# EAGLE board CT_schematic (EAGLE 7.6.0)

Size 100 x 80 mm. Coordinates in mm from the lower left corner, seen from the top.
Outline: 0,0 100,0 100,80 0,80 0,0
Copper layers (1*16): Top 0.035mm / dielectric 1.5mm / Bottom 0.035mm
Design rules "default": minimum track width 10mil, minimum drill 24mil, track to track 8mil, track to pad 8mil, pad to pad 8mil, via to via 8mil, smd to smd 8mil, copper to edge 40mil, drill to drill 8mil, minimum pad ring 10mil, minimum via ring 8mil, stop-mask expansion 4mil, vias tented up to drill 0mil, thermal gap 10mil

## Footprints (pad centres in the part's own frame; a part is rotated, then mirrored left to right if it is on the bottom)
C0603 = smd 0.8 x 0.8: 1 -0.762,0; 2 0.762,0
C0402 = smd 0.5 x 0.5: 1 -0.508,0; 2 0.508,0
C0805 = smd 1.2 x 1.3: 1 -1.016,0; 2 1.016,0
C1210 = smd 1.2 x 2.5: 1 -1.524,0; 2 1.524,0
EXV-9H = smd 3.505 x 1.676: 1 -2.857,0; 2 2.857,0
L0603 = smd 0.8 x 0.8: 1 -0.762,0; 2 0.762,0
PJ-037B_PACKAGE = drill 3.7 square: 1 12,0 | drill 3.2 square: 2 6,0
R0603 = smd 0.8 x 0.8: 1 -0.762,0; 2 0.762,0
LQFP100 = smd 0.3 x 1.2: 1 -6,-7.75; 2 -5.5,-7.75; 3 -5,-7.75; 4 -4.5,-7.75; 5 -4,-7.75; 6 -3.5,-7.75; 7 -3,-7.75; 8 -2.5,-7.75; 9 -2,-7.75; 10 -1.5,-7.75; 11 -1,-7.75; 12 -0.5,-7.75; 13 0,-7.75; 14 0.5,-7.75; 15 1,-7.75; 16 1.5,-7.75; 17 2,-7.75; 18 2.5,-7.75; 19 3,-7.75; 20 3.5,-7.75; 21 4,-7.75; 22 4.5,-7.75; 23 5,-7.75; 24 5.5,-7.75; 25 6,-7.75; 51 6,7.75; 52 5.5,7.75; 53 5,7.75; 54 4.5,7.75; 55 4,7.75; 56 3.5,7.75; 57 3,7.75; 58 2.5,7.75; 59 2,7.75; 60 1.5,7.75; 61 1,7.75; 62 0.5,7.75; 63 0,7.75; 64 -0.5,7.75; 65 -1,7.75; 66 -1.5,7.75; 67 -2,7.75; 68 -2.5,7.75; 69 -3,7.75; 70 -3.5,7.75; 71 -4,7.75; 72 -4.5,7.75; 73 -5,7.75; 74 -5.5,7.75; 75 -6,7.75 | smd 1.2 x 0.3: 26 7.75,-6; 27 7.75,-5.5; 28 7.75,-5; 29 7.75,-4.5; 30 7.75,-4; 31 7.75,-3.5; 32 7.75,-3; 33 7.75,-2.5; 34 7.75,-2; 35 7.75,-1.5; 36 7.75,-1; 37 7.75,-0.5; 38 7.75,0; 39 7.75,0.5; 40 7.75,1; 41 7.75,1.5; 42 7.75,2; 43 7.75,2.5; 44 7.75,3; 45 7.75,3.5; 46 7.75,4; 47 7.75,4.5; 48 7.75,5; 49 7.75,5.5; 50 7.75,6; 76 -7.75,6; 77 -7.75,5.5; 78 -7.75,5; 79 -7.75,4.5; 80 -7.75,4; 81 -7.75,3.5; 82 -7.75,3; 83 -7.75,2.5; 84 -7.75,2; 85 -7.75,1.5; 86 -7.75,1; 87 -7.75,0.5; 88 -7.75,0; 89 -7.75,-0.5; 90 -7.75,-1; 91 -7.75,-1.5; 92 -7.75,-2; 93 -7.75,-2.5; 94 -7.75,-3; 95 -7.75,-3.5; 96 -7.75,-4; 97 -7.75,-4.5; 98 -7.75,-5; 99 -7.75,-5.5; 100 -7.75,-6
SOT-23-6 = smd 1.1 x 0.6: 1 -1.4,0.95; 2 -1.4,0; 3 -1.4,-0.95; 4 1.4,-0.95; 5 1.4,0; 6 1.4,0.95
LGA14R35P5X6_200X200X100 = smd 0.35 x 0.15: 1 -0.8,0.525; 2 -0.8,0.175; 3 -0.8,-0.175; 4 -0.8,-0.525; 8 0.8,-0.525; 9 0.8,-0.175; 10 0.8,0.175; 11 0.8,0.525 | smd 0.15 x 0.35: 5 -0.35,-0.8; 6 0,-0.8; 7 0.35,-0.8; 12 0.35,0.8; 13 0,0.8; 14 -0.35,0.8
ESP8266-12E = smd 2 x 1.2: 1 -7.5,7; 2 -7.5,5; 3 -7.5,3; 4 -7.5,1; 5 -7.5,-1; 6 -7.5,-3; 7 -7.5,-5; 8 -7.5,-7; 15 7.5,-7; 16 7.5,-5; 17 7.5,-3; 18 7.5,-1; 19 7.5,1; 20 7.5,3; 21 7.5,5; 22 7.5,7 | smd 1.1 x 1.7: 9 -5,-8.5; 10 -3,-8.5; 11 -1,-8.5; 12 1,-8.5; 13 3,-8.5; 14 5,-8.5
SAMTEC_FTSH-105-01-L-DV-K = smd 0.762 x 2.794: 1 -2.54,-2.032; 2 -2.54,2.032; 3 -1.27,-2.032; 4 -1.27,2.032; 5 0,-2.032; 6 0,2.032; 7 1.27,-2.032; 8 1.27,2.032; 9 2.54,-2.032; 10 2.54,2.032
MOLEX_47219-2001 = smd 0.8 x 1.5: 1 3.2,-2.1; 2 2.1,-2.1; 3 1,-2.1; 4 -0.1,-2.1; 5 -1.2,-2.1; 6 -2.3,-2.1; 7 -3.4,-2.1; 8 -4.5,-2.1 | smd 1.5 x 2.05: G1 6.875,-4.7; G2 6.875,3.6; G3 -6.875,3.6; G4 -6.875,-4.7
MICRO_USB_AB = smd 0.4 x 1.35: 1 1.3,0.26; 2 0.65,0.26; 3 0,0.26; 4 -0.65,0.26; 5 -1.3,0.26 | drill 0.6 pad 0.95 long: 6 4.175,-2.54; 7 -4.175,-2.54 | drill 0.7 pad 1.1 long: 8 -2.225,0.46; 9 2.225,0.46
SOT143B = smd 1 x 0.7: 1 -0.75,-1 | smd 0.6 x 0.7: 2 0.95,-1; 3 0.95,1; 4 -0.95,1
ABLS-25.000MHZ-B2F-T = smd 5.6 x 2.8: 1 -3.81,0; 2 5.69,0
ASEK = smd 1.4 x 1: 1 -1.1,-0.8; 2 1.1,-0.8; 3 1.1,0.8; 4 -1.1,0.8
WSON-8 = smd 0.3 x 0.6: 1 -0.75,0; 2 0.05,0; 3 0.85,0; 4 1.65,0; 5 1.65,3.8; 6 0.85,3.8; 7 0.05,3.8; 8 -0.75,3.8 | smd 3 x 2.6: PAD 0.45,1.9
SON-6 = smd 0.55 x 0.3: 1 -0.355,0.5 | smd 0.52 x 0.3: 2 -0.37,0; 3 -0.37,-0.5; 4 0.37,-0.5; 5 0.37,0; 6 0.37,0.5
SW_4-1437565-2 = smd 1.4 x 2.1: 1 -2.23,4.55; 2 -2.23,-4.55; 3 2.23,4.55; 4 2.23,-4.55
LGM67K-G1J2-24-Z = smd 0.8 x 1.4: A -2,0; C 0,0
NC7SZ125M5X = smd 1.3 x 0.7: 1 -1.3,0.95; 2 -1.3,0; 3 -1.3,-0.95; 4 1.3,-0.95; 5 1.3,0.95

## Placement (x,y rotation side)
C1  1e-06  [C0603]  -30.48,85.09 0 top  (outside the outline)
C2  1e-07  [C0603]  -34.29,85.09 0 top  (outside the outline)
C3  1e-07  [C0603]  -38.1,85.09 0 top  (outside the outline)
C4  1e-07  [C0603]  -41.91,85.09 0 top  (outside the outline)
C5  1e-07  [C0603]  -45.72,85.09 0 top  (outside the outline)
C6  1e-07  [C0603]  -49.53,85.09 0 top  (outside the outline)
C7  1e-07  [C0603]  -53.34,85.09 0 top  (outside the outline)
C8  4.7e-06  [C0603]  -19.05,85.09 0 top  (outside the outline)
C9  2.2e-06  [C0603]  -22.86,85.09 0 top  (outside the outline)
C10  2.2e-06  [C0603]  -26.67,85.09 0 top  (outside the outline)
C11  1e-08  [C0603]  -57.15,85.09 0 top  (outside the outline)
C12  1e-06  [C0603]  -60.96,85.09 0 top  (outside the outline)
C13  1e-11  [C0402]  -41.91,90.17 0 top  (outside the outline)
C14  1e-11  [C0402]  -45.72,90.17 0 top  (outside the outline)
C15  1e-07  [C0402]  -49.53,90.17 0 top  (outside the outline)
C16  1e-07  [C0402]  -53.34,90.17 0 top  (outside the outline)
C17  1e-07  [C0402]  -57.15,90.17 0 top  (outside the outline)
C18  1e-05  [C0805]  -21.59,74.93 0 top  (outside the outline)
C19  1e-07  [C0402]  -60.96,90.17 0 top  (outside the outline)
C20  1e-07  [C0402]  -64.77,90.17 0 top  (outside the outline)
C21  1e-05  [C0805]  -26.67,74.93 0 top  (outside the outline)
C22  1e-08  [C0402]  -68.58,90.17 0 top  (outside the outline)
C23  1e-08  [C0402]  -72.39,90.17 0 top  (outside the outline)
C24  1e-05  [C1210]  -38.1,68.58 0 top  (outside the outline)
C25  1e-05  [C1210]  -44.45,68.58 0 top  (outside the outline)
C26  1e-08  [C0402]  -76.2,90.17 0 top  (outside the outline)
C27  1e-05  [C1210]  -50.8,68.58 0 top  (outside the outline)
C28  1e-05  [C1210]  -57.15,68.58 0 top  (outside the outline)
C29  1e-07  [C0402]  -80.01,90.17 0 top  (outside the outline)
C30  0.0001  [EXV-9H]  -38.1,60.96 0 top  (outside the outline)
C31  0.0001  [EXV-9H]  -49.53,60.96 0 top  (outside the outline)
C32  1e-08  [C0402]  -15.24,95.25 0 top  (outside the outline)
C33  1e-08  [C0402]  -19.05,95.25 0 top  (outside the outline)
C34  1e-08  [C0402]  -22.86,95.25 0 top  (outside the outline)
F1  240.0  [L0603]  -64.77,85.09 0 top  (outside the outline)
J1  PJ-037B  [PJ-037B_PACKAGE]  -57.15,38.1 0 top  (outside the outline)
R2  1000.0  [R0603]  -68.58,85.09 0 top  (outside the outline)
R4  4700.0  [R0603]  -72.39,85.09 0 top  (outside the outline)
R5  4700.0  [R0603]  -76.2,85.09 0 top  (outside the outline)
R6  2200.0  [R0603]  -80.01,85.09 0 top  (outside the outline)
R7  2200.0  [R0603]  -15.24,90.17 0 top  (outside the outline)
R8  47000.0  [R0603]  -15.24,80.01 0 top  (outside the outline)
R9  10000.0  [R0603]  -20.32,80.01 0 top  (outside the outline)
R10  10000.0  [R0603]  -25.4,80.01 0 top  (outside the outline)
R11  10000.0  [R0603]  -30.48,80.01 0 top  (outside the outline)
R12  10000.0  [R0603]  -35.56,80.01 0 top  (outside the outline)
R13  10000.0  [R0603]  -40.64,80.01 0 top  (outside the outline)
R14  10000.0  [R0603]  -45.72,80.01 0 top  (outside the outline)
R15  10000.0  [R0603]  -50.8,80.01 0 top  (outside the outline)
R16  10000.0  [R0603]  -55.88,80.01 0 top  (outside the outline)
R17  10000.0  [R0603]  -60.96,80.01 0 top  (outside the outline)
R18  10000.0  [R0603]  -66.04,80.01 0 top  (outside the outline)
R19  10000.0  [R0603]  -71.12,80.01 0 top  (outside the outline)
R20  5.0  [R0603]  -19.05,90.17 0 top  (outside the outline)
R21  100000.0  [R0603]  -31.75,74.93 0 top  (outside the outline)
R22  100000.0  [R0603]  -36.83,74.93 0 top  (outside the outline)
R23  100000.0  [R0603]  -41.91,74.93 0 top  (outside the outline)
R24  100000.0  [R0603]  -46.99,74.93 0 top  (outside the outline)
R25  100000.0  [R0603]  -52.07,74.93 0 top  (outside the outline)
R26  100000.0  [R0603]  -57.15,74.93 0 top  (outside the outline)
R27  100000.0  [R0603]  -62.23,74.93 0 top  (outside the outline)
R28  2231.0  [R0603]  -22.86,90.17 0 top  (outside the outline)
R29  1000.0  [R0603]  -26.67,90.17 0 top  (outside the outline)
R30  100000.0  [R0603]  -67.31,74.93 0 top  (outside the outline)
R31  3900.0  [R0603]  -30.48,90.17 0 top  (outside the outline)
R32  1000.0  [R0603]  -34.29,90.17 0 top  (outside the outline)
R33  10000.0  [R0603]  -76.2,80.01 0 top  (outside the outline)
R34  10000.0  [R0603]  -15.24,85.09 0 top  (outside the outline)
R35  9100.0  [R0603]  -38.1,90.17 0 top  (outside the outline)
R36  680000.0  [R0603]  -72.39,74.93 0 top  (outside the outline)
R37  120000.0  [R0603]  -77.47,74.93 0 top  (outside the outline)
U1  STM32F215VGT6  [LQFP100]  -43.18,8.89 0 top  (outside the outline)
U2  MAX4995AAUT+T  [SOT-23-6]  -62.23,67.31 0 top  (outside the outline)
U3  BMC150  [LGA14R35P5X6_200X200X100]  -33.02,68.58 0 top  (outside the outline)
U4  ESP8266-12E  [ESP8266-12E]  -21.59,12.7 0 top  (outside the outline)
U5  FTSH-105-01-L-DV-K  [SAMTEC_FTSH-105-01-L-DV-K]  -35.56,38.1 0 top  (outside the outline)
U6  0472192001  [MOLEX_47219-2001]  -62.23,8.89 0 top  (outside the outline)
U7  47590-0001  [MICRO_USB_AB]  -66.04,38.1 0 top  (outside the outline)
U8  prtr5v0u2ax  [SOT143B]  -35.56,95.25 0 top  (outside the outline)
U9  ABLS-25.000MHZ-B2F-T  [ABLS-25.000MHZ-B2F-T]  -68.58,60.96 0 top  (outside the outline)
U10  ASEK-32.768KHz-ECST  [ASEK]  -29.21,60.96 0 top  (outside the outline)
U11  LP3878SDX-ADJ/NOPB  [WSON-8]  -49.53,48.26 0 top  (outside the outline)
U12  LP3878SDX-ADJ/NOPB  [WSON-8]  -69.85,48.26 0 top  (outside the outline)
U13  TPS3895ADRYR  [SON-6]  -39.37,93.98 0 top  (outside the outline)
U14  4-1437565-2  [SW_4-1437565-2]  -27.94,50.8 0 top  (outside the outline)
U15  Q65110A2395  [LGM67K-G1J2-24-Z]  -17.78,68.58 0 top  (outside the outline)
U16  nc7sz125m5x  [NC7SZ125M5X]  -67.31,67.31 0 top  (outside the outline)
U17  nc7sz125m5x  [NC7SZ125M5X]  -73.66,67.31 0 top  (outside the outline)
U18  nc7sz125m5x  [NC7SZ125M5X]  -15.24,73.66 0 top  (outside the outline)

## Library data of the parts
C1-C34 F1 J1 R2 R4-R37 U1-U18 = circuit_tree

## Nets
CLK_CRYSTAL_U1_12: C13.1 U1.12 U9.1
CLK_CRYSTAL_U1_13: C14.1 U1.13 U9.2
CLK_U1_8: U1.8 U10.3
GND: C1.2 C2.2 C3.2 C4.2 C5.2 C6.2 C7.2 C8.2 C9.2 C10.2 C11.2 C12.2 C13.2 C14.2 C15.2 C16.2 C17.2 C18.2 C19.2 C20.2 C21.2 C22.2 C23.2 C24.2 C25.2 C26.2 C27.2 C28.2 C29.2 C30.2 C31.2 C32.2 C33.2 C34.2 J1.2 R2.2 R8.2 R9.2 R11.2 R15.2 R19.2 R20.2 R29.2 R32.2 R35.2 R37.2 U1.10 U1.20 U1.27 U1.74 U2.2 U3.1 U3.6 U3.7 U3.9 U4.15 U5.3 U5.5 U6.6 U6.G1 U6.G2 U6.G3 U6.G4 U7.5 U7.6 U7.7 U7.8 U7.9 U8.1 U10.2 U11.3 U11.PAD U12.3 U12.PAD U13.2 U15.C U16.2 U16.3 U17.1 U17.3 U18.1 U18.3
NET_U1_14: R5.1 U1.14 U18.4
NET_U1_22: C11.1 C12.1 F1.1 U1.21 U1.22
NET_U1_49: C9.1 U1.49
NET_U1_73: C10.1 U1.73
NET_U1_92: R6.1 U1.92 U3.11
NET_U1_93: R7.1 U1.93 U3.14
NET_U1_94: R9.1 U1.94
NET_U1_97: U15.A
NET_U1_98: U14.3 U14.4
NET_U2_3: R8.1 U2.3
NET_U4_1: R4.1 U4.1 U17.4
NET_U4_3: R13.1 U4.3
NET_U4_18: R14.1 U4.18
NET_U5_9: R20.1 U5.9
NET_U11_1: C23.1 U11.1
NET_U11_6: R28.2 R29.1 U11.6
NET_U11_8: R27.1 U11.8
NET_U12_1: C26.1 U12.1
NET_U12_6: R31.2 R32.1 U12.6
NET_U12_8: R30.1 U12.8
NET_U13_1: R34.1 R35.1 U13.1
NET_U13_3: R36.2 R37.1 U13.3
NET_U13_4: R33.1 U13.4 U16.4 U17.2 U18.2
NET_U14_1: R2.1 U14.1 U14.2
PROC_GPIO_TO_U1_USB_FAULT: R10.1 U1.2 U2.6
PROC_GPIO_TO_U1_VBUS_EN: R11.1 U1.1 U2.4
PROC_SDIO_CK: R22.1 U1.80 U6.5
PROC_SDIO_CMD: R21.1 U1.83 U6.3
PROC_SDIO_D0: R23.1 U1.65 U6.7
PROC_SDIO_D1: R24.1 U1.66 U6.8
PROC_SDIO_D2: R25.1 U1.78 U6.1
PROC_SDIO_D3: R26.1 U1.79 U6.2
PROC_SPI1_MISO: U1.31 U4.6
PROC_SPI1_MOSI: U1.32 U4.7
PROC_SPI1_NSS: R15.1 U1.29 U4.16
PROC_SPI1_SCK: U1.30 U4.5
PROC_SYS_JTCK_SWCLK: R19.1 U1.76 U5.4
PROC_SYS_JTDI: R17.1 U1.77 U5.8
PROC_SYS_JTDO_SWO: U1.89 U5.6
PROC_SYS_JTMS_SWDIO: R18.1 U1.72 U5.2
PROC_USB_OTG_FS_DM: U1.70 U7.2 U8.3
PROC_USB_OTG_FS_DP: U1.71 U7.3 U8.2
PROC_USB_OTG_FS_ID: U1.69 U7.4
PROC_USB_OTG_FS_VBUS: U1.68 U2.1 U7.1 U8.4
RST_OUT_U5_JTAG_RST_B: R16.1 U5.10 U16.1
VCC_S1_15V8: C24.1 C27.1 C30.1 C31.1 J1.1 R27.2 R30.2 U11.4 U12.4
VCC_TIER1_3V3: C1.1 C2.1 C3.1 C4.1 C5.1 C6.1 C7.1 C8.1 C15.1 C16.1 C17.1 C18.1 C19.1 C20.1 C21.1 C22.1 C25.1 C29.1 C32.1 C33.1 C34.1 F1.2 R4.2 R5.2 R6.2 R7.2 R10.2 R12.1 R12.2 R13.2 R14.2 R16.2 R17.2 R18.2 R21.2 R22.2 R23.2 R24.2 R25.2 R26.2 R28.1 R33.2 R34.2 R36.1 U1.6 U1.11 U1.19 U1.28 U1.50 U1.75 U1.100 U3.8 U3.10 U3.12 U3.13 U4.8 U5.1 U6.4 U10.4 U11.5 U13.6 U16.5 U17.5 U18.5
VCC_TIER1_5V0: C28.1 R31.1 U2.5 U12.5

## Tracks (layer width: path | path; a pad name or v marks a point on that pad's centre or on a via)
CLK_CRYSTAL_U1_12  (2 unrouted)
CLK_CRYSTAL_U1_13  (2 unrouted)
CLK_U1_8  (1 unrouted)
GND  (81 unrouted)
NET_U1_14  (2 unrouted)
NET_U1_22  (4 unrouted)
NET_U1_49  (1 unrouted)
NET_U1_73  (1 unrouted)
NET_U1_92  (2 unrouted)
NET_U1_93  (2 unrouted)
NET_U1_94  (1 unrouted)
NET_U1_98  (1 unrouted)
NET_U2_3  (1 unrouted)
NET_U4_1  (2 unrouted)
NET_U4_3  (1 unrouted)
NET_U4_18  (1 unrouted)
NET_U5_9  (1 unrouted)
NET_U11_1  (1 unrouted)
NET_U11_6  (2 unrouted)
NET_U11_8  (1 unrouted)
NET_U12_1  (1 unrouted)
NET_U12_6  (2 unrouted)
NET_U12_8  (1 unrouted)
NET_U13_1  (2 unrouted)
NET_U13_3  (2 unrouted)
NET_U13_4  (4 unrouted)
NET_U14_1  (2 unrouted)
PROC_GPIO_TO_U1_USB_FAULT  (2 unrouted)
PROC_GPIO_TO_U1_VBUS_EN  (2 unrouted)
PROC_SDIO_CK  (2 unrouted)
PROC_SDIO_CMD  (2 unrouted)
PROC_SDIO_D0  (2 unrouted)
PROC_SDIO_D1  (2 unrouted)
PROC_SDIO_D2  (2 unrouted)
PROC_SDIO_D3  (2 unrouted)
PROC_SPI1_MISO  (1 unrouted)
PROC_SPI1_MOSI  (1 unrouted)
PROC_SPI1_NSS  (2 unrouted)
PROC_SPI1_SCK  (1 unrouted)
PROC_SYS_JTCK_SWCLK  (2 unrouted)
PROC_SYS_JTDI  (2 unrouted)
PROC_SYS_JTDO_SWO  (1 unrouted)
PROC_SYS_JTMS_SWDIO  (2 unrouted)
PROC_USB_OTG_FS_DM  (2 unrouted)
PROC_USB_OTG_FS_DP  (2 unrouted)
PROC_USB_OTG_FS_ID  (1 unrouted)
PROC_USB_OTG_FS_VBUS  (3 unrouted)
RST_OUT_U5_JTAG_RST_B  (2 unrouted)
VCC_S1_15V8  (8 unrouted)
VCC_TIER1_3V3  (63 unrouted)
VCC_TIER1_5V0  (3 unrouted)